# Altium PCB Chassis_V2.PcbDoc
Units mm, origin at the board's own origin, x right, y up, seen from the top; angles counter-clockwise.
Board outline 52 x 26 mm, 2 copper layers (Top Layer, Bottom Layer); 46 components, 30 nets, 183 pads, 48 vias.
Unrouted connection lines stored in the file: 50.
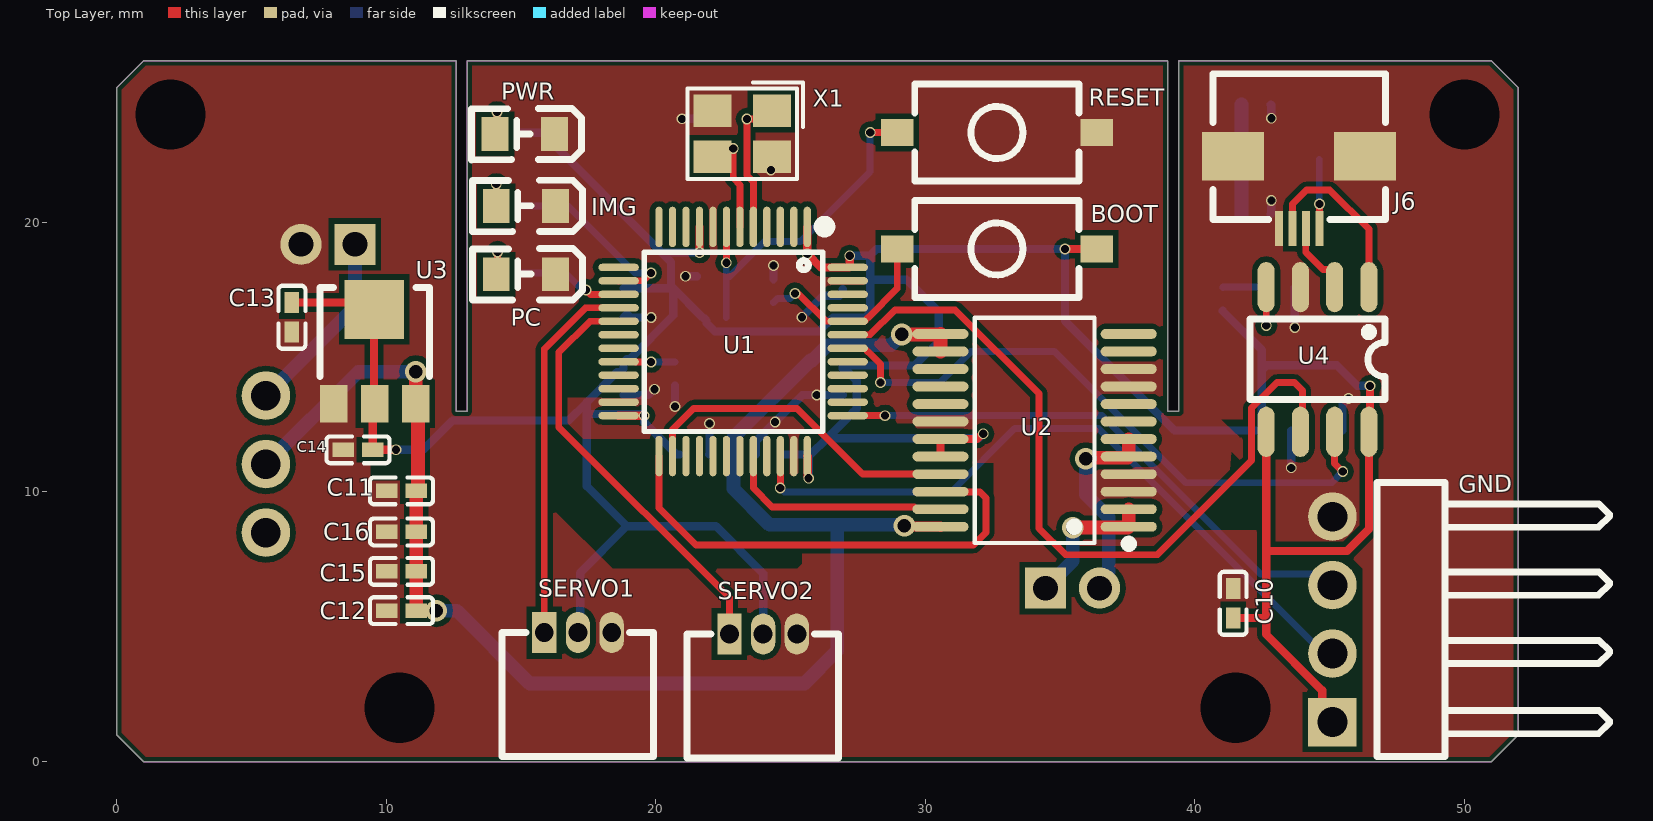
[diagram p0: Top Layer view]
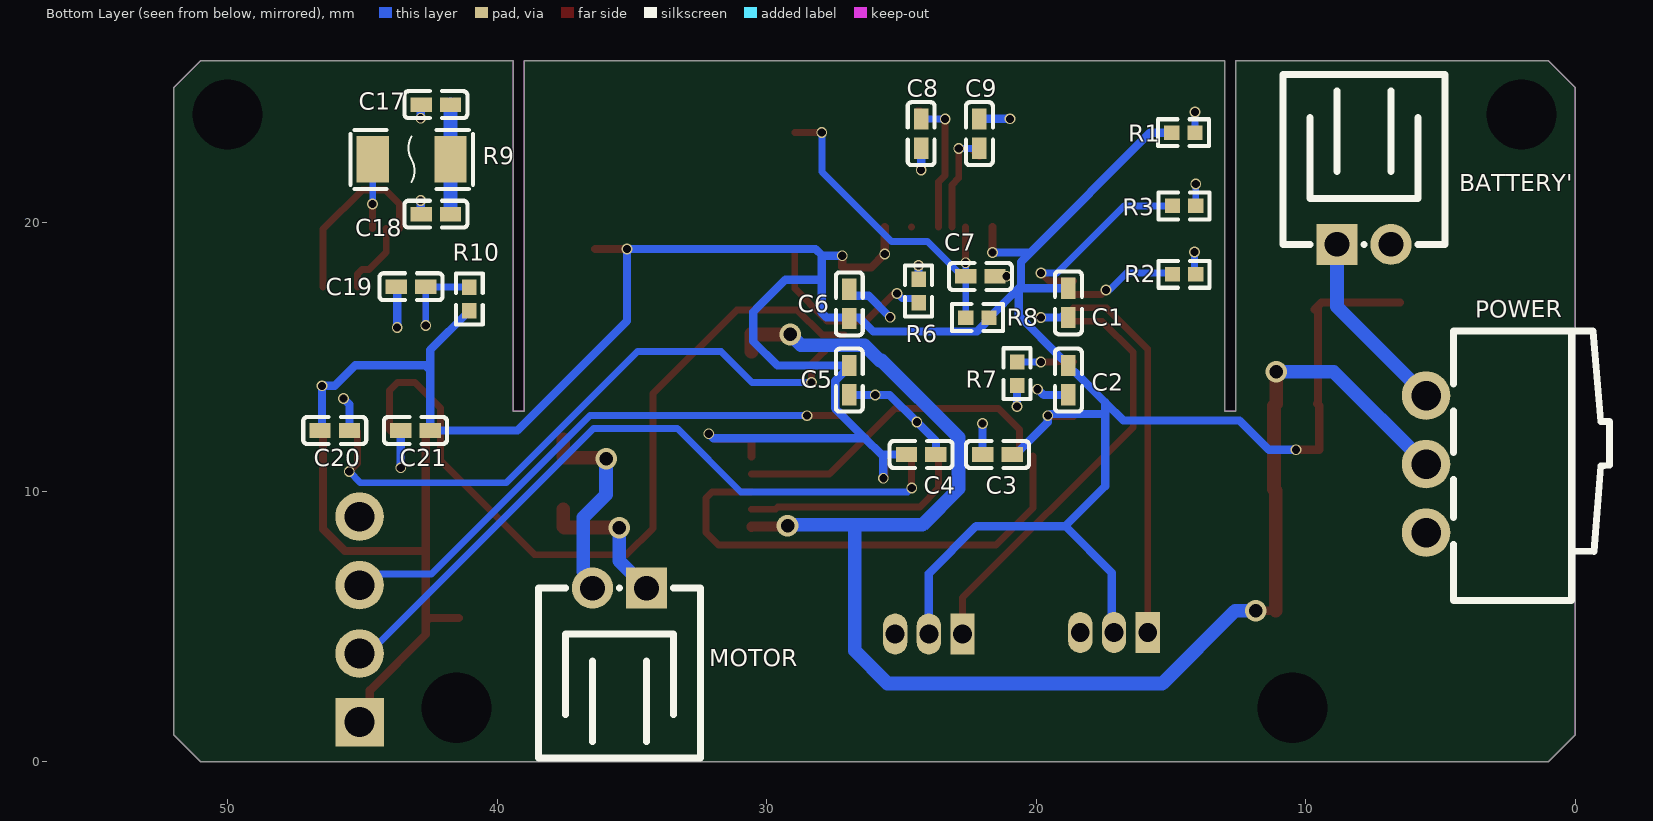
[diagram p1: Bottom Layer view, seen from below]

## Layer stack, top to bottom
Top Solder: solder mask 0.0102, Solder Resist, Dk 3.5
Top Layer: signal copper 0.0356
Dielectric 1: dielectric 0.32, FR-4, Dk 4.8
Bottom Layer: signal copper 0.0356
Bottom Solder: solder mask 0.0102, Solder Resist, Dk 3.5

## Board outline
1,-0.013 0,0.987 0,24.987 1,25.987 12.6,25.987 12.6,12.987 13,12.987 13,25.987 39,25.987 39,12.987 39.4,12.987 39.4,25.987 51,25.987 52,24.987 52,0.987 51,-0.013

## Design rules (kind name [scope] priority, off if disabled: settings)
Clearance [All] p1: gap=0.2 ignorepadtopadclearanceinfootprint=FALSE except(0: Arc-Hole Track-Hole SMDPad-Hole THPad-Hole Via-Hole Fill-Hole Poly-Hole Region-Hole Text-Hole; 0.1: Arc-SMDPad Track-SMDPad SMDPad-SMDPad; 0.18: Arc-Arc Arc-Track Arc-THPad Arc-Via Arc-Fill Arc-Poly Arc-Region Arc-Text Track-Track Track-THPad Track-Via Track-Fill Track-Poly Track-Region Track-Text; 0.5: THPad-Via Via-Via)
HoleSize [All] p1: absolutevalues=TRUE maxlimit=3.2 minlimit=0.025 maxpercent=80.000 minpercent=20.000
HoleToHoleClearance [All] p1: gap=0.305 allowstackedmicrovias=TRUE
MinimumSolderMaskSliver [All] p1: minsoldermaskwidth=0.051
PasteMaskExpansion [All] p1: expansion=0.05
PlaneClearance [All] p1: clearance=0.254
PlaneConnect [All] p1: planeconnectstyle=Direct reliefexpansion=0.508 reliefentries=4 reliefconductorwidth=0.254 reliefairgap=0.254
PolygonConnect [All] p1: connectstyle=Direct reliefconductorwidth=0.254 reliefentries=4 polygonreliefangle="90 Angle" airgapwidth=0.254
RoutingVias [All] p1: holewidth=0.3 width=0.4 viastyle="Through Hole" minholewidth=0.3 minwidth=0.4 maxholewidth=0.6 maxwidth=0.8
SilkToSilkClearance [All] p1: silktosilkclearance=0.025
SilkToSolderMaskClearance [IsPad] p1: minsilkscreentomaskgap=0.051 clearancetoexposedcopper=TRUE
SolderMaskExpansion [All] p1: expansion=0.1 istentingtop=FALSE
UnRoutedNet [All] p1: checkbadconnections=TRUE
Width PWR_idth [InNetClass('PWR')] p1: maxlimit=0.508 minlimit=0.305 preferedwidth=0.305 minimp=50.000000 maximp=50.000000 favimp=50.000000
Width [All] p2: maxlimit=0.254 minlimit=0.254 preferedwidth=0.254
21 further rules are at their usual default settings.

## Classes and differential pairs
net class PWR: AO1 AO2 GND NetBATTERY'_1 VBUS "VCC 3V3" VM

## Components (designator, comment, footprint, x,y, rotation, side; value= is the part's Value field where it differs from the comment)
BATTERY' "PH2.0-2pin" CONN-TH_2P-P2.00_GP01-2001WR-2P 7.839,19.177 r180 bottom (schematic designator J4)
BOOT "Switch" KEY-SMD_2P-L6.0-W3.6-P7.4-LS8.0-L 32.655,19.009 r0 top (schematic designator SW1)
C1 "CAP-0402" C0402 18.806,17.007 r90 bottom
C2 "CAP-0402" C0402 18.806,14.139 r90 bottom
C3 "CAP-0402" C0402 21.436,11.382 r180 bottom
C4 "CAP-0402" C0402 24.267,11.382 r0 bottom
C5 "CAP-0402" C0402 26.934,14.139 r90 bottom
C6 "CAP-0402" C0402 26.934,16.97 r270 bottom
C7 "CAP-0402" C0402 22.071,17.986 r0 bottom
C8 "CAP-0402" C0402 24.267,23.283 r270 bottom
C9 "CAP-0402" C0402 22.108,23.283 r270 bottom
C10 "CAP-0402" C0402 41.418,5.863 r270 top
C11 "CAP-0402" C0402 10.566,10.033 r0 top
C12 "CAP-0402" C0402 10.566,5.588 r0 top
C13 "CAP-0402" C0402 6.502,16.473 r90 top
C14 "CAP-0402" C0402 8.952,11.557 r0 top
C15 "CAP-0402" C0402 10.566,7.047 r0 top
C16 "CAP-0402" C0402 10.566,8.509 r0 top
C17 "CAP-0402" C0402 42.269,24.362 r180 bottom
C18 "CAP-0402" C0402 42.269,20.298 r180 bottom
C19 "CAP-0402" C0402 43.19,17.605 r180 bottom
C20 "CAP-0402" C0402 46.021,12.271 r0 bottom
C21 "CAP-0402" C0402 43.026,12.271 r180 bottom
GND "HDR-1X4" HDR-TH_4P-P2.54-H-M-W10.4 45.101,5.267 r90 top (schematic designator J1)
IMG "LED0805-RD" LED0805-RD 15.182,20.602 r180 top (schematic designator D3)
J6 "AFC01-S04FCC-00" FFC-SMD_4P-P0.50_AFC01-S04FCC-00 43.867,21.105 r180 top
MOTOR "PH2.0-2pin" CONN-TH_2P-P2.00_GP01-2001WR-2P 35.458,6.426 r0 bottom (schematic designator J5)
PC "LED0805-RD" LED0805-RD 15.182,18.067 r180 top (schematic designator D2)
POWER "BSI-10H" SW-TH_BSI-10H 5.537,11.024 r90 bottom (schematic designator SW3)
PWR "LED0805-RD" LED0805-RD 15.142,23.269 r180 top (schematic designator D1)
R1 "RES-0402" R0402 14.539,23.32 r0 bottom
R2 "RES-0402" R0402 14.514,18.067 r0 bottom
R3 "RES-0402" R0402 14.514,20.602 r0 bottom
R6 "RES-0402" R0402 24.362,17.448 r90 bottom
R7 "RES-0402" R0402 20.711,14.378 r90 bottom
R8 "RES-0402" R0402 22.183,16.462 r180 bottom
R9 "TLC F1206" F1206 43.167,22.33 r180 bottom
R10 "RES-0402" R0402 41.031,17.149 r270 bottom
RESET "Switch" KEY-SMD_2P-L6.0-W3.6-P7.4-LS8.0-L 32.655,23.327 r180 top (schematic designator SW2)
SERVO1 "MX1.25-3pin" CONN-TH_3P-P1.25_BX-MX1.25-3PWZ 17.114,4.775 r0 top (schematic designator J2)
SERVO2 "MX1.25-3pin" CONN-TH_3P-P1.25_BX-MX1.25-3PWZ 23.983,4.724 r0 top (schematic designator J3)
U1 "STM32F103C8T6" LQFP-48_L7.0-W7.0-P0.50-LS9.0-BL 22.87,15.573 r180 top
U2 "TB6612FNG" SSOP-24_L8.4-W5.8-P0.65-LS7.8-BL 34.052,12.278 r90 top
U3 "CJA1117B-3.3" SOT-89 9.621,13.279 r0 top
U4 "CH340N" SOP-8_L4.9-W3.9-P1.27-LS6.0-BL 44.547,14.906 r180 top
X1 "OSC CRYSTAL-SMD_4P-L3.2-W2.5-BL" CRYSTAL-SMD_4P-L3.2-W2.5-BL 23.208,23.281 r180 top

## Footprints (in the part's own frame and the unit in brackets; to place one, negate y for a bottom-side part, rotate by r counter-clockwise, add the part's x,y. Pads: shape width x height; smd on the part's side, far side on the other; paste and mask are expansions set on the pad)
C0402 [mm]
  rect 0.79x0.54 smd paste-100 mask+0.051: 1(-0.545,0) 2(0.545,0)
  silkscreen extent -1.17,-0.5 1.17,0.5
CONN-TH_2P-P2.00_GP01-2001WR-2P [mil]
  rect 60x60 hole 36: 1(-39.37,0)
  round 60 hole 36: 2(39.37,0)
  silkscreen extent -118,0 118,248
CONN-TH_3P-P1.25_BX-MX1.25-3PWZ [mm]
  rect 0.9x1.524 hole 0.7: 1(-1.25,0)
  oval 0.9x1.524 hole 0.7: 2(0,0) 3(1.25,0)
  silkscreen extent -2.83,-4.6 2.8,0
CRYSTAL-SMD_4P-L3.2-W2.5-BL [mm]
  rect 1.4x1.2 smd paste+0 mask+0.051: 1(-1.1,-0.85) 2(1.1,-0.85) 3(1.1,0.85) 4(-1.1,0.85)
  silkscreen extent -2.26,-1.91 2.03,1.68
F1206 [mil]
  rect 46.9x68 smd paste+0 mask+2: 1(-56.9,0) 2(56.9,0)
  silkscreen extent -89,-43 89,43
FFC-SMD_4P-P0.50_AFC01-S04FCC-00 [mm]
  rect 0.3x1.3 smd paste+0 mask+0.05: 1(-0.75,1.34) 2(-0.25,1.34) 3(0.25,1.34) 4(0.75,1.34)
  rect 2.3x1.8 smd: 5(2.45,-1.34) 6(-2.45,-1.34)
  silkscreen extent -3.2,-4.4 3.2,1
HDR-TH_4P-P2.54-H-M-W10.4 [mm]
  rect 1.8x1.8 hole 1.1: 1(-3.81,0)
  round 1.8 hole 1.1: 2(-1.27,0) 3(1.27,0) 4(3.81,0)
  silkscreen extent -5.09,-10.27 5.07,-1.65
KEY-SMD_2P-L6.0-W3.6-P7.4-LS8.0-L [mm]
  rect 1.2x1 smd: 1(-3.7,0) 2(3.7,0)
  silkscreen extent -3.05,-1.8 3.05,1.8
LED0805-RD [mm]
  rect 1x1.25 smd paste+0 mask+0.051: 1(-1.1,0) 2(1.1,0)
  silkscreen extent -2.1,-0.95 1.98,0.96
LQFP-48_L7.0-W7.0-P0.50-LS9.0-BL [mm]
  oval 0.27x1.5 smd paste+0 mask+0.05: 1(-2.75,-4.25) 2(-2.25,-4.25) 3(-1.75,-4.25) 4(-1.25,-4.25) 5(-0.75,-4.25) 6(-0.25,-4.25) 7(0.25,-4.25) 8(0.75,-4.25) 9(1.25,-4.25) 10(1.75,-4.25) 11(2.25,-4.25) 12(2.75,-4.25) 25(2.75,4.25) 26(2.25,4.25) 27(1.75,4.25) 28(1.25,4.25) 29(0.75,4.25) 30(0.25,4.25) 31(-0.25,4.25) 32(-0.75,4.25) 33(-1.25,4.25) 34(-1.75,4.25) 35(-2.25,4.25) 36(-2.75,4.25)
  oval 1.5x0.27 smd paste+0 mask+0.05: 13(4.25,-2.75) 14(4.25,-2.25) 15(4.25,-1.75) 16(4.25,-1.25) 17(4.25,-0.75) 18(4.25,-0.25) 19(4.25,0.25) 20(4.25,0.75) 21(4.25,1.25) 22(4.25,1.75) 23(4.25,2.25) 24(4.25,2.75) 37(-4.25,2.75) 38(-4.25,2.25) 39(-4.25,1.75) 40(-4.25,1.25) 41(-4.25,0.75) 42(-4.25,0.25) 43(-4.25,-0.25) 44(-4.25,-0.75) 45(-4.25,-1.25) 46(-4.25,-1.75) 47(-4.25,-2.25) 48(-4.25,-2.75)
  silkscreen extent -3.59,-4.46 3.3,3.34
R0402 [mm]
  rect 0.566x0.54 smd paste-100 mask+0.051: 1(-0.433,0) 2(0.433,0)
  silkscreen extent -0.94,-0.5 0.94,0.5
SOP-8_L4.9-W3.9-P1.27-LS6.0-BL [mm]
  oval 0.63x1.865 smd: 1(-1.905,-2.682) 2(-0.635,-2.682) 3(0.635,-2.682) 4(1.905,-2.682) 5(1.905,2.682) 6(0.635,2.682) 7(-0.635,2.682) 8(-1.905,2.682)
  silkscreen extent -2.5,-1.5 2.5,1.48
SOT-89 [mil]
  rect 40x55 smd paste+0 mask+4: 1(-61.81,-0.58) 2(-1.81,-0.58) 3(58.19,-0.58)
  rect 86.61x86.61 smd paste+0 mask+4: 2(-2.76,137.22)
  silkscreen extent -82,39 78,169
SSOP-24_L8.4-W5.8-P0.65-LS7.8-BL [mm]
  oval 0.364x2.082 smd: 1(-3.575,-3.491) 2(-2.925,-3.491) 3(-2.275,-3.491) 4(-1.625,-3.491) 5(-0.975,-3.491) 6(-0.325,-3.491) 7(0.325,-3.491) 8(0.975,-3.491) 9(1.625,-3.491) 10(2.275,-3.491) 11(2.925,-3.491) 12(3.575,-3.491) 13(3.575,3.491) 14(2.925,3.491) 15(2.275,3.491) 16(1.625,3.491) 17(0.975,3.491) 18(0.325,3.491) 19(-0.325,3.491) 20(-0.975,3.491) 21(-1.625,3.491) 22(-2.275,3.491) 23(-2.925,3.491) 24(-3.575,3.491)
  silkscreen extent -4.36,-3.64 4.18,2.22
SW-TH_BSI-10H [mm]
  round 1.8 hole 1.1: 1(0,0) 2(2.54,0) 3(-2.54,0)
  silkscreen extent -5.06,-6.8 4.94,-1.02

## Part data
BATTERY' MOTOR: "PH2.0-2pin公头端子", BOM名称=2P接插件, 封装库来自淘宝卖家 ID：黄晶宝石=其他店铺购入均为盗版假冒封装库, 联系卖家，免费查找封装=唯一出售店铺网址https://shop463601444.taobao.com
BOOT RESET: "滑动开关", Actuator/Cap Color=白色, Contact Current=50mA, Insulation Resistance=-, JLCPCB Part Class=扩展库, LCSC Part Name="6*3.6*2.5mm 立贴 轻触开关", Manufacturer="XKB Connectivity(中国星坤)", Manufacturer Part=TS-1101-B-W, Operating Force=160gf, Operating Temperature=-30℃~+85℃, Voltage Rating (DC)=12V, Actuator Style=矩形按钮, Add into BOM=yes, Circuit=单刀单掷, Convert to PCB=yes, Datasheet=https://atta.szlcsc.com/upload/public/pdf/source/20211011/D0E0CAF534F7B19DDE4CE68748A25BD3.pdf, Device=TS-1101-B-W_C500065, Mechanical Life=5万次, Mounting Style=立贴, Strike Gundam=否, Supplier=LCSC, Supplier Footprint=SMD, Supplier Part=C500065, Switch Height=2.5mm, Switch Length=6mm, Switch Width=3.6mm, Symbol=TS-1101-B-W, With Lamp=无
C1 C2 C3 C4 C5 C6 C7 C8 C9 C10 C11 C12 C13 C14 C15 C16 C17 C18 C19 C20 C21: "0402贴片电容", JLCPCB Part Class="Extended Part", LCSC Part Name="100nF ±10% 50V", Manufacturer=SAMSUNG(三星), Manufacturer Part=CL21B104KBCNNNC, Temperature Coefficient=X7R, Tolerance=±10%, Voltage Rated=50V, Add into BOM=yes, Convert to PCB=yes, Datasheet=https://atta.szlcsc.com/upload/public/pdf/source/20160103/1457707693305.pdf, Device=CL21B104KBCNNNC, Supplier=LCSC, Supplier Footprint=0805, Supplier Part=C1711, Symbol=CL21B104KBCNNNC
GND: library part HDR-1X4-弯排针, "1X4弯排针", Add into BOM=yes, Convert to PCB=yes, Device=HDR-M_2.54_1x4P, Supplier Footprint=插件, Supplier Part=C2935929, Symbol=PZ254V-11-04P
IMG PC PWR: "LED", Color Temperature=-, Forward Current=20mA, Forward Voltage (VF)=3.3V, JLCPCB Part Class="Extended Part", LCSC Part Name=LED贴片0805超高亮蓝光, Lens Color=无色透明, Manufacturer=MEIHUA(美华科技), Manufacturer Part=MHT170UBCT, Operating Temperature=-40~+85, Power Dissipation=95mW, Add into BOM=yes, Convert to PCB=yes, Datasheet=https://atta.szlcsc.com/upload/public/pdf/source/20190515/C389525_9DDE5770D44EFFE682D3E1E38A61D6F4.pdf, Device=MHT170UBCT, Diode Configuration=-, Dominant Wavelength=460nm~475nm, Luminous Flux (@25℃)=-, Luminous Intensity=225mcd, Mounting Sytle=-, Peak Wavelength=468nm, Supplier=LCSC, Supplier Footprint=0805, Supplier Part=C389525, Symbol=MHT170UBCT, Viewing Angle=140°
J6: library part FPC0.5-4pin, "4pin FPC接口，间距0.5mm", JLCPCB Part Class="Extended Part", LCSC Part Name="间距:0.5mm P数:4P 翻盖式 下接", Manufacturer=JS(钜硕电子), Add into BOM=yes, Contact Type=下接, Convert to PCB=yes, Datasheet=https://atta.szlcsc.com/upload/public/pdf/source/20190816/C413942_2A72D1AC756EAE17EEDF756A339D4500.pdf, Device=AFC01-S04FCC-00, FFC, FCB Thickness=0.3mm, Height Above Board=2mm, Locking Feature=翻盖式, Manufacturer Part=AFC01-S04FCC-00, Mounting Type=卧贴, Number of Contacts=4P, Pitch=0.5mm, Supplier=LCSC, Supplier Footprint=SMD,P=0.5mm,卧贴, Supplier Part=C262260, Symbol=AFC01-S04FCC-00
POWER: library part Switch-三脚开关, "三脚开关", Current Rating (DC)=50mA, JLCPCB Part Class="Extended Part", Manufacturer="SM Switch", Operating Temperature=-40℃~+85℃, Voltage Rating (DC)=12V, Add into BOM=yes, Convert to PCB=yes, Datasheet=https://atta.szlcsc.com/upload/public/pdf/source/20230506/E6C7D73CE6DA310EE0253B6F4CD83EFB.pdf, Device=BSI-10H_C5775777, LCSC Part Name=BSI-10H, Manufacturer Part=BSI-10H, Supplier=LCSC, Supplier Footprint=插件, Supplier Part=C5775777, Symbol=BSI-10H_C5775777
R1 R2 R3 R6 R7 R8 R10: "0402贴片电阻", JLCPCB Part Class="Extended Part", LCSC Part Name="1kΩ ±5%", Manufacturer=FH(风华), Manufacturer Part=RS-05K102JT, Operating Temperature Range=-55~+155, Overload Voltage (Max)=150V, Power(Watts)=125mW, Temperature Coefficient=±100ppm/, Tolerance=±5%, Add into BOM=yes, Convert to PCB=yes, Datasheet=https://atta.szlcsc.com/upload/public/pdf/source/20170704/1499151304704.pdf, Device=RS-05K102JT, Supplier=LCSC, Supplier Footprint=0805, Supplier Part=C115302, Symbol=RS-05K102JT
R9: "保险丝", Current Rating (Max)=100A, Hold Current=1A, JLCPCB Part Class="Extended Part", LCSC Part Name="6V 1A 自恢复", Manufacturer=TLC(竞沃), Manufacturer Part=TLC-NSMD100, Operating Temperature=-40~+85, Operating Voltage (Max)=6V, Power Dissipation=600mW, Resistance - Initial (Ri) (Min)=-, Trip Current=2A, Add into BOM=yes, Convert to PCB=yes, Datasheet=https://atta.szlcsc.com/upload/public/pdf/source/20180802/C261954_CE31CE21EEB143DB51778C363DF0F083.pdf, Device=TLC-NSMD100, Maximum Time to Trip=100ms, Resistance - Post Trip (R1) (Max)=-, Supplier=LCSC, Supplier Footprint=1206, Supplier Part=C261954, Symbol=TLC-NSMD100
SERVO1 SERVO2: "MX1.25 3pin 公头端子", Add into BOM=yes, Convert to PCB=yes, Device=HDR-M_2.54_1x3P, Supplier Footprint=插件, Supplier Part=C2937625, Symbol=PZ254V-11-03P_C2937625
U1: "STM32F103C8T6 MCU", JLCPCB Part Class=扩展库, LCSC Part Name="STM32F103C8T6 MSL=3", Low-Voltage Detect=有, Manufacturer=ST(意法半导体), Operating Temperature Range=-40℃~+85℃, Operating Voltage Range=2V~3.6V, ADC (Bit)=12bit, Add into BOM=yes, CCP Capture/Compare=-, communication protocol=-, Convert to PCB=yes, CPU Core=CM3, CPU Maximum Speed=72MHz, DAC (Bit)=-, Datasheet=https://atta.szlcsc.com/upload/public/pdf/source/20220812/8363ACEC51AD55ECEB84799464F7CB85.pdf, Device=STM32F103C8T6, Direct Memory Access=有, GPIO Ports Number=37, Infrared Data Association=有, Internal Comparator=-, Internal Oscillator=有, Manufacturer Part=STM32F103C8T6, Peripheral/Function=看门狗；DMA；看门狗；片载温度传感器, Program Memory Type=FLASH, Program Storage Size=64KB, PWM (Bit)=-, RAM Size=20KB, Real-Time Clock=-, Secure Digital Input and Output=-, Supplier=LCSC, Supplier Footprint=LQFP-48(7x7), Supplier Part=C8734, Symbol=STM32F103C8T6, Universal Serial Bus=有, Watchdog=有
U2: "TB6612FNG电机驱动", BOM名称=TB6612FNG, 联系卖家，免费查找封装=唯一出售店铺网址https://shop463601444.taobao.com
U3: "3.3V线性稳压器"
U4: "USB转串口", JLCPCB Part Class="Extended Part", LCSC Part Name=USB转串口芯片CH340, Manufacturer=WCH(南京沁恒), Operating Temperature=-20℃~+70℃, Supply Voltage=3.3V；5V, Add into BOM=yes, Applications Function=USB转串口, Convert to PCB=yes, Data Rate=2Mbps, Datasheet=https://atta.szlcsc.com/upload/public/pdf/source/20240313/115CDE92081B1D6CB446704AD5D0F5F2.pdf, Device=CH340N, Manufacturer Part=CH340N, Number of Channels=1, Protocol="USB 2.0", Supplier=LCSC, Supplier Footprint=SOP-8, Supplier Part=C2977777, Symbol=CH340N_C2977777
X1: "四脚晶振", Equivalent Series Resistance (ESR)=80Ω, Frequency Stability=-, Frequency Tolerance=±10ppm, JLCPCB Part Class="Extended Part", LCSC Part Name="12MHz ±10ppm 20pF", Load Capacitance=20pF, Manufacturer=JGHC(晶光华), Manufacturer Part=S3212000201080, Operating Temperature=-40~+85, Add into BOM=yes, Convert to PCB=yes, Crystal Type=贴片无源晶振, Datasheet=https://atta.szlcsc.com/upload/public/pdf/source/20191012/C426972_E2C41F8C78BF72E52773F7737EA32F83.pdf, Device=S3212000201080, Supplier=LCSC, Supplier Footprint=SMD3225-4P, Supplier Part=C426972, Symbol=S3212000201080

## Free pads (board coordinates)
  round 1.524 hole 2.6 mask+0.9: 2(2,23.987) 3(50,23.987) 4(41.5,1.987) 5(10.5,1.987)

## Via types
v1: diameter 0.4, hole 0.3, Top Layer to Bottom Layer, 42 vias
v2: diameter 0.8, hole 0.5, Top Layer to Bottom Layer, 6 vias

## Nets (pads, with @x,y where several pads share a name; then routed paths per layer and width w, separated by ;. In a path a pad name is that pad's centre, name@x,y a point inside that pad or via, vN(x,y) a via of type N, cw(c..) or ccw(c..) an arc to the next point about the centre after c; other vN are vias at no path point)
AIN1: U1.26 U2.21 | length 12.3
  Top Layer w0.254: U1.26 20.62,12.309 21.404,13.093 25.236,13.093 27.676,10.653 U2.21
AIN2: U1.25 U2.22 | length 17.9
  Top Layer w0.254: U1.25 20.12,9.394 21.488,8.026 31.78,8.026 32.243,8.489 32.243,9.768 32.02,9.992 30.572,9.992 U2.22
AO1: MOTOR.1 U2.1 U2.2 | length 5.4
  Top Layer w0.508: v2(35.47,8.672) 37.512,8.672 U2.1 U2.2
  Bottom Layer w0.508: MOTOR.1 35.47,7.438 v2(35.47,8.672)
AO2: MOTOR.2 U2.5 U2.6 | length 7.6
  Top Layer w0.508: v2(35.957,11.23) 35.993,11.266 37.507,11.266 U2.5 U2.6
  Bottom Layer w0.508: v2(35.957,11.23) 35.957,9.89 36.802,9.045 36.802,7.045 36.458,6.701 MOTOR.2
BOOT0: BOOT.1 R6.1 U1.44 | length 7.2
  Top Layer w0.254: v1(25.162,17.358) 25.248,17.358 25.264,17.373 26.31,16.326 27.117,16.326 U1.44 27.739,16.323 27.877,16.461 27.885,16.461 28.955,17.532 BOOT.1
  Bottom Layer w0.254: R6.1@24.355,17.021 R6.1@24.362,17.028 ; R6.1 24.517,17.171 24.975,17.171 v1(25.162,17.358)
BOOT1: R7.2 U1.20 | length 2.1
  Top Layer w0.254: U1.20 18.623,14.82 19.249,14.82 19.252,14.818 v1(19.828,14.818)
  Bottom Layer w0.254: v1(19.828,14.818) 20.704,14.818 R7.2
D+: J6.3 U4.1 | length 6.7
  Top Layer w0.254: J6.3 43.617,20.674 44.136,21.193 44.999,21.193 46.452,19.741 U4.1
D-: J6.2 U4.2 | length 2.8
  Top Layer w0.254: J6.2 44.11,19.758 44.11,18.882 44.746,18.246 45.008,18.246 45.182,18.073 U4.2
GND: BATTERY'.2 C1.1 C2.1 C3.1 C4.1 C5.1 C6.1 C7.1 C8.2 C9.1 C10.1 C11.1 C12.1 C13.1 C14.1 C15.1 C16.1 C17.1 C18.1 C19.1 C20.1 C21.1 GND.4 IMG.1 J6.4 J6.5 J6.6 pad.2 pad.3 pad.4 pad.5 PC.1 PWR.1 R6.2 R7.1 RESET.1 SERVO1.3 SERVO2.3 U1.8 U1.23 U1.35 U1.47 U2.3 U2.4 U2.9 U2.10 U2.18 U3.1 U4.3 X1.2 X1.4 | length 18.9
  Bottom Layer w0.305: C2.1 19.722,13.594 19.929,13.802 v1(19.955,13.802) ; C1.1 18.939,16.596 19.066,16.469 v1(19.828,16.469) ; R7.1 20.717,13.939 v1(20.717,13.167) ; v1(20.971,23.835) 22.101,23.835 C9.1 ; v1(21.098,17.993) 21.519,17.993 C7.1 ; C3.1 21.987,11.389 v1(21.987,12.532) ; C4.1 23.722,11.88 v1(24.427,12.586) 25.436,13.594 v1(25.97,13.594) C5.1 ; v1(24.267,21.936) C8.2 C8.2@24.319,22.685 ; R6.2 v1(24.362,18.389) ; v1(25.416,16.474) 26.215,17.273 26.816,17.273 26.934,17.39 C6.1 ; C18.1 42.834,20.318 v1(42.834,20.806) ; C17.1 42.834,24.341 v1(42.834,23.854) ; v1(43.571,10.887) C21.1 ; v1(43.704,16.088) 43.704,17.575 C19.1 ; C20.1 45.476,13.245 v1(45.692,13.461)
IMG: R3.2 U1.14 | length 7.2
  Top Layer w0.254: U1.14 18.623,17.826 19.535,17.826 v1(19.822,18.113)
  Bottom Layer w0.254: R3.2 16.742,20.602 19.231,18.113 v1(19.822,18.113)
NetBATTERY'_1: BATTERY'.1 POWER.2 | length 7
  Bottom Layer w0.508: POWER.2 8.839,16.866 BATTERY'.1
NetC19_2: C19.2 R10.1 U4.4 | length 4.5
  Top Layer w0.254: U4.4 42.643,17.587 42.643,16.173 v1(42.645,16.171)
  Bottom Layer w0.254: R10.1 41.042,17.594 42.633,17.594 C19.2 v1(42.645,16.171)
NetIMG_2: IMG.2 R3.1 | length 1.6
  Top Layer w0.254: IMG.2 v1(14.082,21.415)
  Bottom Layer w0.254: R3.1 v1(14.082,21.415)
NetJ6_1: J6.1 R9.1 | length 2.6
  Top Layer w0.254: J6.1 v1(44.617,20.674)
  Bottom Layer w0.254: R9.1 44.612,20.679 v1(44.617,20.674)
NetPC_2: PC.2 R2.1 | length 1.6
  Top Layer w0.254: PC.2 14.13,18.116 v1(14.13,18.899)
  Bottom Layer w0.254: R2.1@14.13,18.113 v1(14.13,18.899)
NetPWR_2: PWR.2 R1.1 | length 1.6
  Top Layer w0.254: PWR.2 14.107,23.334 v1(14.107,24.082)
  Bottom Layer w0.254: R1.1 v1(14.107,24.082)
NRST: C7.2 R8.1 RESET.2 U1.7 | length 12.8
  Top Layer w0.254: v1(22.616,18.494) 22.62,18.498 U1.7 ; v1(27.956,23.327) RESET.2
  Bottom Layer w0.254: R8.1 C7.2 ; v1(22.616,18.494) C7.2 ; v1(27.956,23.327) 27.95,23.32 27.95,21.869 25.362,19.282 24.036,19.282 22.741,17.986 C7.2
OSC_IN: C8.1 U1.5 X1.1 | length 6.2
  Top Layer w0.254: U1.5 23.62,21.498 23.381,21.737 23.381,23.825 v1(23.378,23.828) 24.005,23.828 X1.1 X1.1@24.408,24.131
  Bottom Layer w0.254: v1(23.378,23.828) C8.1
OSC_OUT: C9.2 U1.6 X1.3 | length 4.7
  Top Layer w0.254: X1.3 22.414,22.738 v1(22.874,22.738) 22.874,21.63 23.12,21.385 U1.6
  Bottom Layer w0.254: C9.2 v1(22.874,22.738)
PC: R2.2 U1.15 | length 4
  Top Layer w0.254: v1(17.415,17.485) 17.576,17.323 U1.15
  Bottom Layer w0.254: R2.2@14.996,18.113 16.659,18.113 17.288,17.485 v1(17.415,17.485)
PWMA: U1.32 U2.23 | length 8.5
  Top Layer w0.254: U1.32 23.62,10.137 24.316,9.44 29.585,9.44 29.672,9.353 U2.23
RX: U1.43 U4.6 | length 29.4
  Top Layer w0.254: U1.43 27.123,15.826 27.949,15.826 28.867,16.744 31.107,16.744 34.211,13.641 34.211,8.644 35.189,7.666 38.607,7.666 42.1,11.158 42.1,13.102 43.046,14.048 43.688,14.048 43.985,13.751 43.985,12.297 U4.6
SERVO1: SERVO1.1 U1.16 | length 13.9
  Top Layer w0.254: SERVO1.1 15.864,15.299 17.389,16.823 U1.16
SERVO2: SERVO2.1 U1.17 | length 15.8
  Top Layer w0.254: U1.17 17.56,16.323 16.399,15.162 16.399,12.405 22.733,6.071 SERVO2.1
SWCLK: GND.3 U1.37 | length 19.8
  Top Layer w0.254: U1.37 v1(28.506,12.823)
  Bottom Layer w0.254: v1(28.506,12.823) 36.554,12.823 42.434,6.944 GND.3@44.466,6.944
SWDIO: GND.2 U1.34 | length 25.4
  Top Layer w0.254: v1(24.616,10.142) 24.62,10.145 U1.34
  Bottom Layer w0.254: v1(24.616,10.142) 24.766,9.993 30.96,9.993 33.314,12.346 36.418,12.346 44.36,4.404 GND.2@44.466,4.404
TX: U1.42 U4.7 | length 23.5
  Top Layer w0.254: U1.42 27.739,15.323 27.877,15.185 27.885,15.185 28.337,14.733 v1(28.337,14.056) ; U4.7 45.182,11.054 v1(45.482,10.754)
  Bottom Layer w0.254: v1(28.337,14.056) 30.541,14.056 31.684,15.199 34.793,15.199 39.66,10.332 45.06,10.332 v1(45.482,10.754)
VBUS: C17.2 C18.2 R9.2 | length 4.1
  Bottom Layer w0.305: R9.2 R9.2@41.724,22.328
  Bottom Layer w0.508: C18.2 R9.2@41.724,22.328 ; R9.2@41.724,22.332 C17.2
"VCC 3V3": BOOT.2 C1.2 C2.2 C3.2 C4.2 C5.2 C6.2 C10.2 C13.2 C14.2 C20.2 C21.2 GND.1 R1.2 R8.2 R10.2 SERVO1.2 SERVO2.2 U1.1 U1.9 U1.24 U1.36 U1.48 U2.19 U2.20 U3.2 U4.5 U4.8 | length 150
  Top Layer w0.305: C13.2 9.423,17.018 U3.2@9.677,16.764 ; U3.2@9.498,13.187 C14.2 v1(10.363,11.557) ; U3.2@9.55,16.764 9.55,13.288 U3.2@9.575,13.264 ; U1.24 v1(19.568,12.823) ; v1(21.62,18.875) U1.9 ; U1.36 25.637,11.306 25.637,10.558 25.67,10.525 v1(25.67,10.5) ; U1.1 v1(25.62,18.822) 26.119,18.323 U1.48 U1.48@27.177,18.323 ; U1.48@27.194,18.341 v1(27.194,18.755) ; U2.20 U2.19 31.924,11.953 32.122,12.151 v1(32.147,12.151) ; v1(35.178,19.009) BOOT.2 ; C10.2 42.515,5.318 42.642,5.191 ; U4.5 42.642,7.807 ; GND.1 44.719,1.839 44.719,2.636 42.642,4.714 42.642,5.191 ; v1(46.498,13.929) 46.498,12.27 U4.8 46.452,8.611 45.648,7.807 42.642,7.807 ; 42.642,5.191 42.642,7.807
  Bottom Layer w0.305: v1(10.363,11.557) 11.369,11.557 12.46,12.648 16.769,12.648 17.439,13.318 ; R1.2 15.77,23.32 20.215,18.875 ; SERVO1.2 17.196,4.857 17.196,6.994 18.923,8.722 ; C2.2 18.806,14.559 18.688,14.442 18.563,14.442 17.439,13.318 ; C2.2@18.806,14.809 18.923,14.927 19.039,14.927 20.647,16.535 20.647,17.552 ; C1.2 20.647,17.552 ; C3.2 20.765,11.382 19.568,12.58 v1(19.568,12.823) 19.542,12.823 19.477,12.888 17.439,12.888 ; v1(21.62,18.875) 20.215,18.875 ; SERVO2.2 23.983,6.966 22.228,8.722 18.923,8.722 ; C4.2 25.744,11.382 ; v1(25.67,10.5) 25.67,11.308 25.744,11.382 ; v1(27.194,18.755) 27.93,18.755 ; v1(32.147,12.151) 31.98,11.984 26.345,11.984 ; R10.2 41.031,16.703 42.48,15.254 42.48,14.512 ; C20.2 46.498,12.339 v1(46.498,13.929) 46.024,13.929 45.262,14.691 42.659,14.691 42.48,14.512 ; 17.439,12.888 17.439,10.206 18.923,8.722 ; 17.439,12.888 17.439,13.318 ; 20.215,18.875 20.566,18.525 20.566,17.634 20.647,17.552 ; 20.647,17.552 21.737,16.462 21.763,16.462 21.88,16.345 21.88,16.255 22.196,15.94 23.003,15.94 23.004,15.941 26.045,15.941 26.573,16.469 26.934,16.469 27.777,16.469 27.956,16.647 27.956,17.866 ; 25.744,11.382 26.345,11.984 ; 26.345,11.984 27.308,12.947 27.456,13.094 27.456,14.113 27.127,14.442 27.051,14.442 26.934,14.559 C5.2 29.601,14.684 30.496,15.58 30.496,16.671 30.317,16.85 29.301,17.866 27.956,17.866 ; 27.93,18.755 27.956,18.728 27.956,17.866 ; 27.93,18.755 28.184,19.009 v1(35.178,19.009) 35.178,16.329 39.236,12.271 C21.2 42.48,14.512
VM: C11.2 C12.2 C15.2 C16.2 POWER.1 U2.13 U2.14 U2.24 U3.3 | length 58.2
  Top Layer w0.305: POWER.1@5.324,11.237 POWER.1 ; U3.3 U3.3@11.111,13.251 ; v2@11.099,14.451 v2(11.1,14.453) ; C12.2 v2(11.862,5.588)
  Top Layer w0.381: v2(29.225,8.733) 29.247,8.711 30.553,8.711 U2.24
  Top Layer w0.508: U3.3 v2@11.099,14.451 ; C12.2 C15.2 C16.2 C11.2 11.18,10.102 11.18,13.182 U3.3@11.111,13.251 ; v2(29.122,15.834) U2.13@30.542,15.834 ; U2.14 U2.13
  Bottom Layer w0.305: v2(11.862,5.588) v2@11.865,5.585
  Bottom Layer w0.508: POWER.1 8.966,14.453 v2(11.1,14.453) ; v2@11.865,5.585 12.622,5.585 15.321,2.886 25.514,2.886 26.733,4.106 26.733,8.771 ; v2(29.122,15.834) 28.722,15.433 26.367,15.433 25.802,14.869 25.733,14.869 22.883,12.019 22.883,10.111 24.222,8.771 26.733,8.771 ; v2@29.21,8.718 v2(29.225,8.733) ; v2@29.244,8.771 26.733,8.771
pads on no net: POWER.3 U1.2 U1.3 U1.4 U1.10 U1.11 U1.12 U1.13 U1.18 U1.19 U1.21 U1.22 U1.27 U1.28 U1.29 U1.30 U1.31 U1.33 U1.38 U1.39 U1.40 U1.41 U1.45 U1.46 U2.7 U2.8 U2.11 U2.12 U2.15 U2.16 U2.17
copper on no net: | length 0
  Top Layer w0.254: 24.62,19.823 24.623,19.826

## Polygon pours and split planes (outlines as drawn)
GND on Top Layer "GND_L01_P000" (solid, pour order 0): 1,-0.013 0,0.987 0,24.987 1,25.987 12.6,25.987 12.6,12.987 13,12.987 13,25.987 39,25.987 39,12.987 39.4,12.987 39.4,25.987 51,25.987 52,24.987 52,0.987 51,-0.013

## Keep-outs
Keep-Out Layer:
  lines w0.013: 0.986,0.001 0,0.987 0,24.987 1,25.987 12.6,25.987 12.6,12.987 13,12.987 13,25.987 39,25.987 39,12.987 39.4,12.987 39.4,25.994 50.993,25.994 52,24.987 52,0.987 51,-0.013 48,-0.013 4,-0.013 1,-0.013

## Other copper
Top Layer:
  pour cut-out: 9.43,12.452 9.517,12.365 10.669,12.365 10.669,10.503 10.586,10.42 9.43,10.42
  pour cut-out: 42.185,10.801 42.254,10.801 42.303,10.752 42.291,10.741 42.291,8.585 40.03,8.585 39.98,8.636
  pour cut-out: 40.999,12.676 41.001,12.675 41.783,12.675 41.783,12.083 41.787,12.08 41.738,12.031 41.669,12.031
  pour cut-out: 16.204,11.991 16.253,12.04 16.355,12.04 20.786,7.609 20.331,7.153 18.399,7.153 16.204,9.349
  pour cut-out: 41.367,11.465 41.657,11.175 41.657,11.145 41.316,10.804
  pour cut-out: 43.176,13.735 43.558,13.735 43.672,13.622 43.672,11.366 43.519,11.213 42.981,11.213 42.981,13.337 42.879,13.439
  pour cut-out: 42.981,7.468 45.768,7.468 45.827,7.527 46.201,7.153 46.201,2.557 45.058,2.557 42.981,4.635
  pour cut-out: 45.003,20.567 45.045,20.608 45.141,20.608 46.139,19.611 46.139,16.658 45.967,16.486 44.981,16.486 44.981,18.454 44.637,18.797
  pour cut-out: 26.432,12.532 29.607,12.532 29.607,10.881 27.702,10.881 27.702,11.008 26.305,12.405
  pour cut-out: 27.735,17.982 27.839,17.982 28.166,18.309 28.642,18.309 28.642,17.661 28.181,17.201 28.119,17.263 28.064,17.263 28.064,17.335 27.735,17.665
  pour cut-out: 31.824,10.964 31.924,11.063 32.514,11.063 32.514,9.811 32.02,10.305 31.798,10.305 31.798,10.365 31.732,10.432
  pour cut-out: 24.37,10.462 24.525,10.462 24.62,10.367 24.831,10.578 25.147,10.578 25.278,10.708 25.307,10.68 25.307,10.163 25.566,10.163 25.749,9.979 25.959,10.188 25.959,11.756 26.01,11.807 26.208,11.807 27.676,10.339 29.315,10.339 29.315,10.28 29.383,10.212 29.383,9.733 29.315,9.666 24.534,9.666 24.011,10.189 24.017,10.195 24.017,10.266 24.019,10.266 24.12,10.367
  pour cut-out: 20.433,10.289 20.61,10.467 23.129,10.467 24.404,9.192 24.404,9.04 28.892,9.04 28.954,8.978 28.954,8.788 28.481,8.315 21.652,8.304 20.433,9.524
  pour cut-out: 19.689,9.557 19.738,9.606 19.807,9.606 19.807,10.68 19.778,10.708 19.778,11.938 17.33,11.938 17.288,11.897
  pour cut-out: 20.331,7.153 25.245,7.153 25.416,7.325 25.416,8.087 20.209,8.087
  pour cut-out: 17.541,15.862 17.895,15.862 17.923,15.834 17.874,15.785 17.874,13.508 16.693,13.508 16.653,13.548 16.712,13.607 16.712,15.032

## Silkscreen, mask and mechanical layers (free items; w line width, h text height)
Top Solder:
  drawing of 5 lines, arcs and shapes, not listed